# EAGLE board OpenBook_PCB (EAGLE 9.7.0)
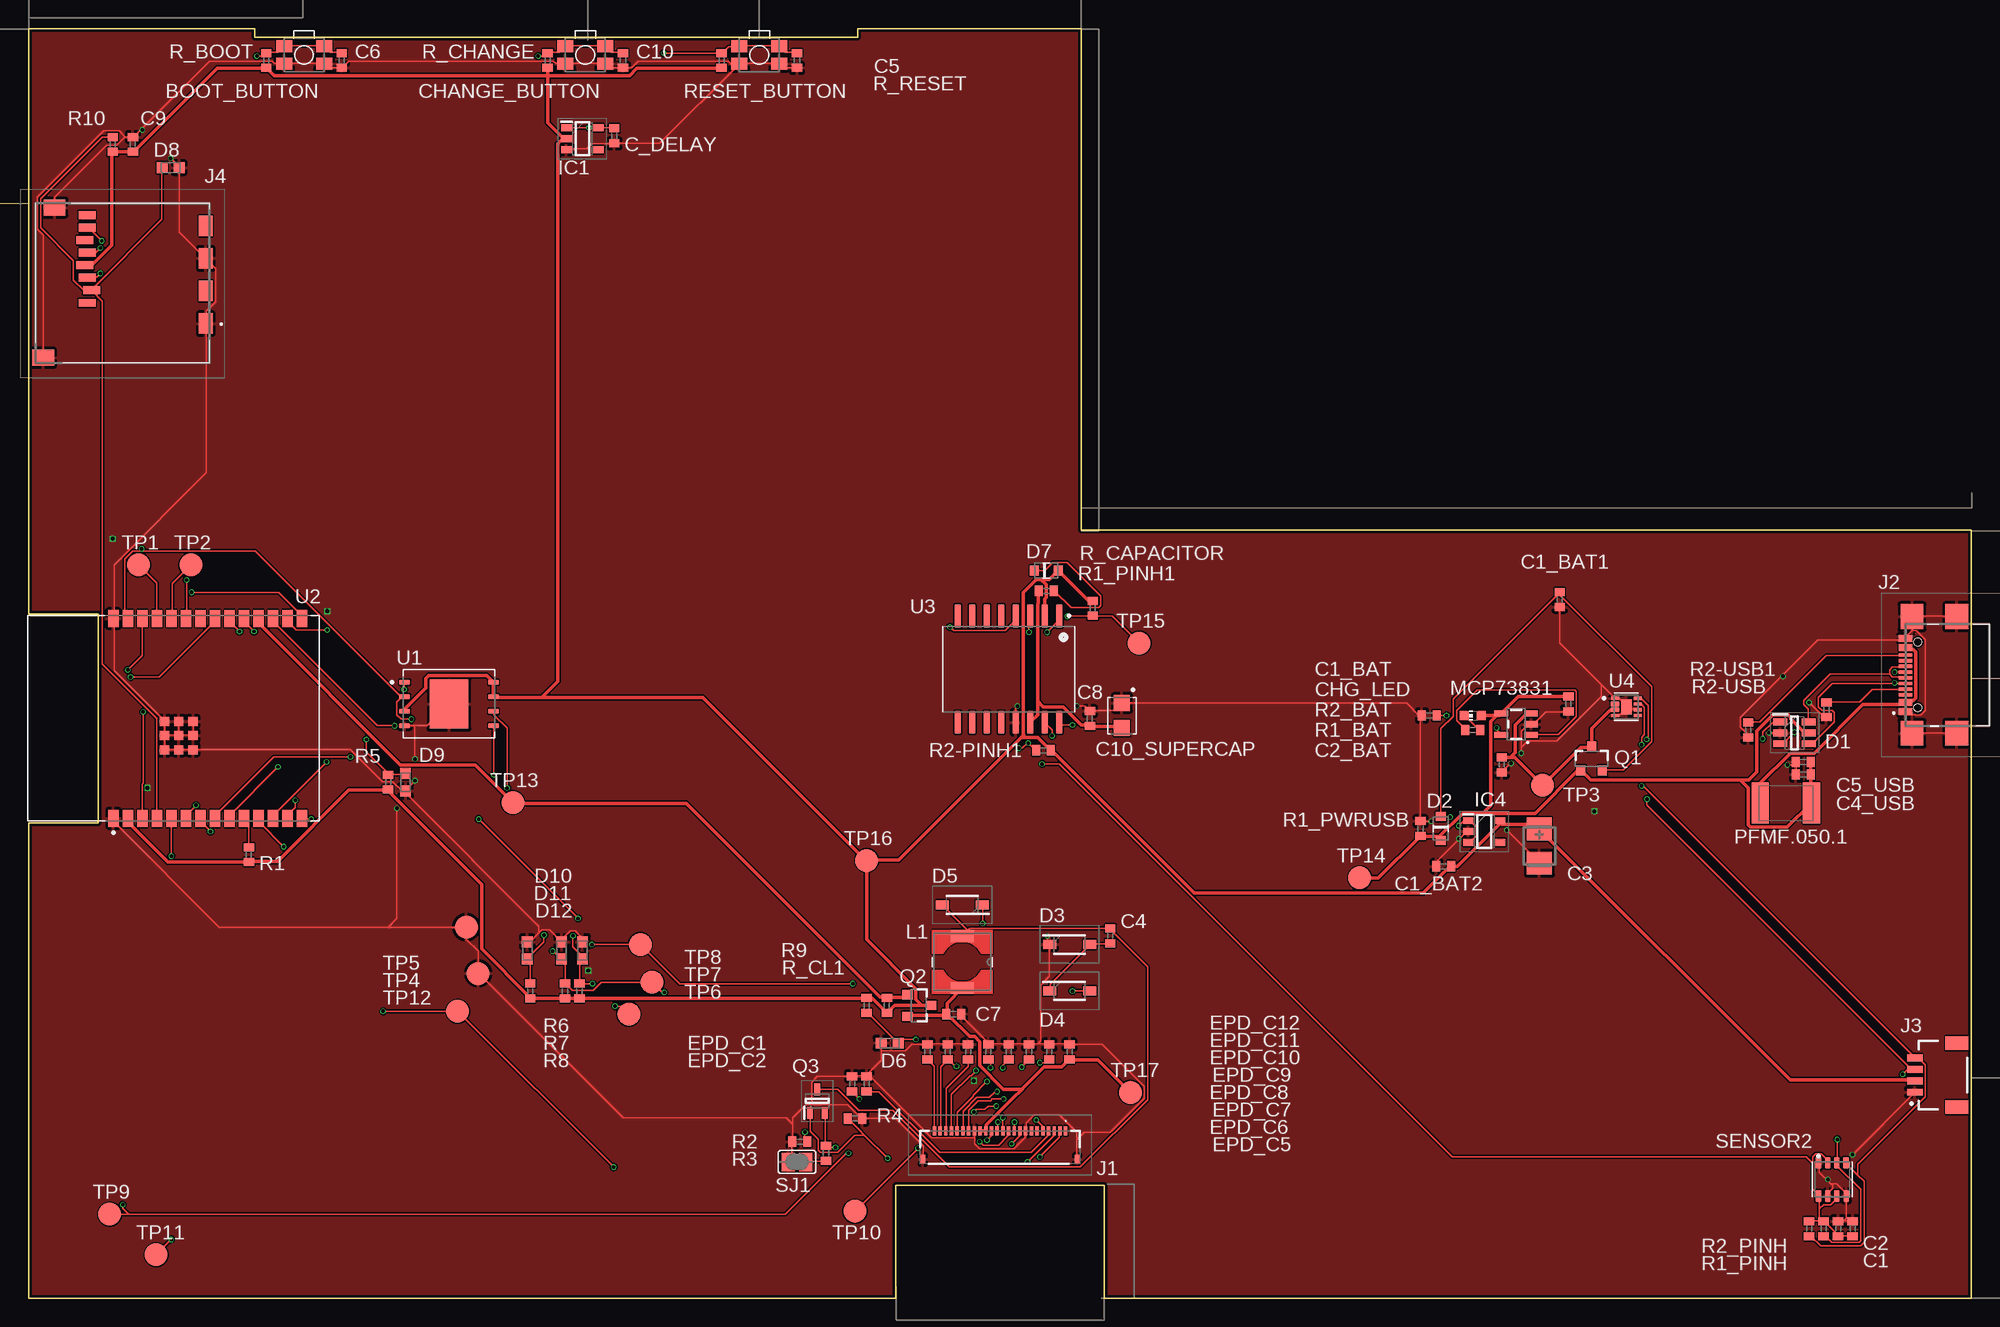
[diagram p0: board, top side]
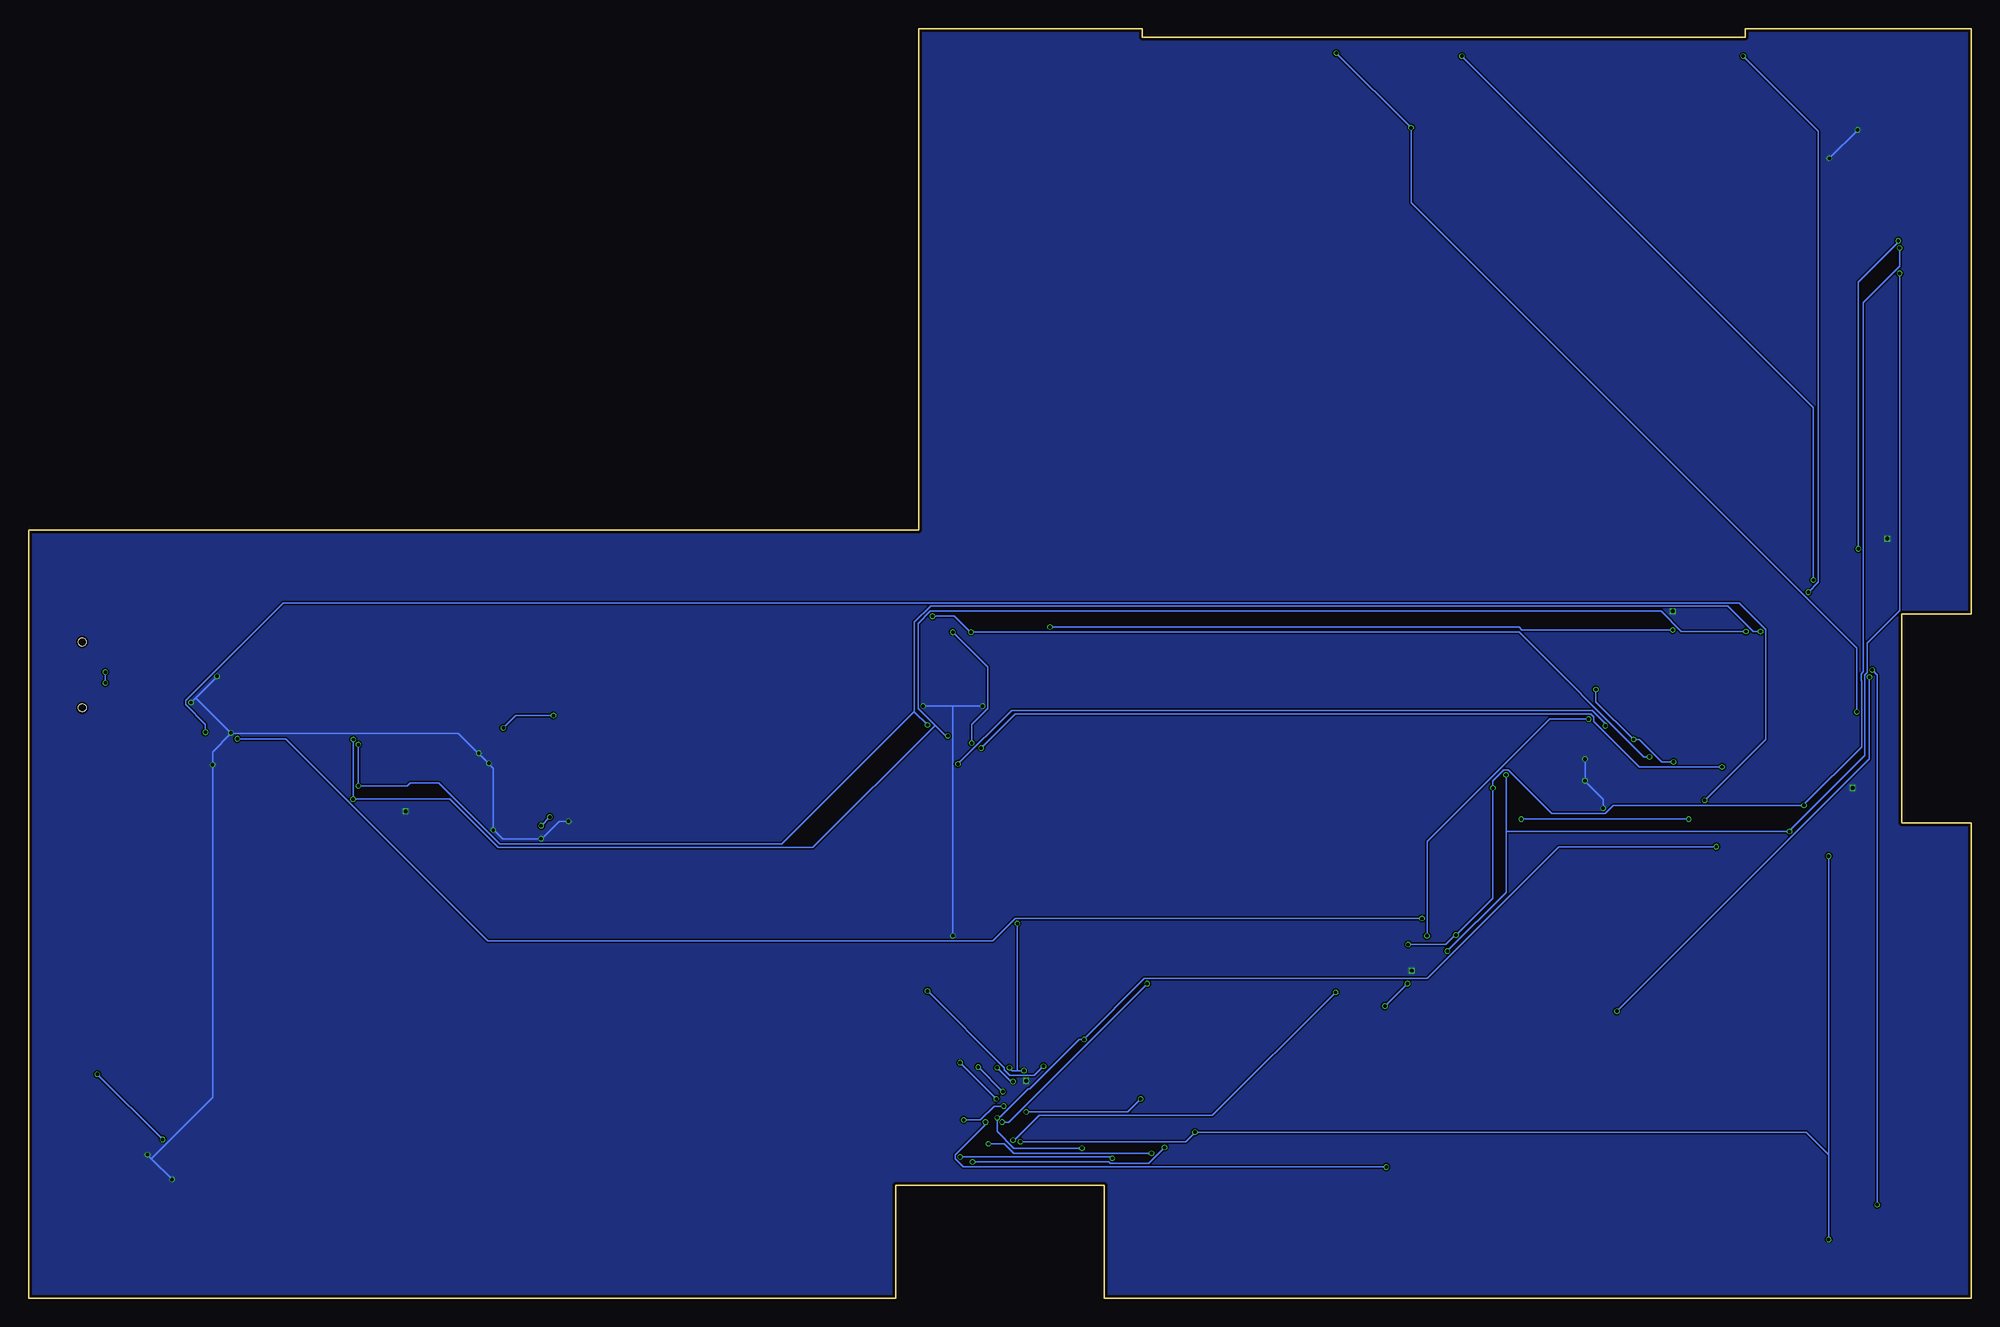
[diagram p1: board, bottom side, seen from below]

Size 170.18 x 111.25 mm. Coordinates in mm from the lower left corner, seen from the top.
Outline: 0,111.25 19.81,111.25 19.81,110.49 72.64,110.49 72.64,111.25 92.2,111.25 92.2,67.31 170.18,67.31 170.18,0 94.23,0 94.23,9.91 75.95,9.91 75.95,0 0,0 0,41.66 6.1,41.66 6.1,59.94 0,59.94 0,111.25
Copper layers (1*16): Top 0.035mm / dielectric 1.6mm / Bottom 0.035mm
Design rules "jlcpcb-2layers.dru *": minimum track width 5mil, minimum drill 0.3mm, track to track 5mil, track to pad 5mil, pad to pad 5mil, via to via 5mil, smd to smd 5mil, copper to edge 0.2mm, drill to drill 6mil, minimum pad ring 10mil, minimum via ring 3mil, stop-mask expansion 4mil, vias tented up to drill 0mil, thermal gap 10mil
Net classes: 1 POWER: width 0.3 mm; 2 NORMAL: width 0.15 mm

## Footprints (pad centres in the part's own frame; a part is rotated, then mirrored left to right if it is on the bottom)
MYBUTTON = smd 1.4 x 1.05: 1 1.75,0.75; 2 -1.75,0.75; 3 -1.75,-0.75; 4 1.75,-0.75
EAGLE-LTSPICE_C0402 = smd 0.7 x 0.9: 1 -0.65,0; 2 0.65,0
RCL_CT3528 = smd 2 x 2.2: + -1.5,0; - 1.5,0
CAPCP3225X100N = smd 1.4 x 1.4: 1 -1.1,0; 2 1.1,0
ADAFRUIT_CHIP-LED0603 = smd 0.8 x 0.8: A 0,-0.75; C 0,0.75
SOT95P280X145-6N = smd 1.2 x 0.6: 1 -1.25,0.95; 2 -1.25,0; 3 -1.25,-0.95; 4 1.25,-0.95; 5 1.25,0; 6 1.25,0.95
ESP32_WROVER_AVX---SD0805S020S1R0_AVX_SD0805S020S1R0_0 = smd 0.8 x 0.9: 1 -1.05,0; 2 1.05,0
SOD3716X135N = smd 1.15 x 0.8: 1 -1.75,0; 2 1.75,0
DIOC1608X36N = smd 0.97 x 0.94: 1 -0.75,0; 2 0.75,0
SOT95P280X125-5N = smd 0.9 x 0.6: 1 -1.4,0.95; 2 -1.4,0; 3 -1.4,-0.95; 4 1.4,-0.95; 5 1.4,0.95
SOT95P280X120-5N = smd 0.9 x 0.6: 1 -1.4,0.95; 2 -1.4,0; 3 -1.4,-0.95; 4 1.4,-0.95; 5 1.4,0.95
FH34SRJ24S05SH99 = smd 0.3 x 0.8: 1 5.75,1.45; 2 5.25,1.45; 3 4.75,1.45; 4 4.25,1.45; 5 3.75,1.45; 6 3.25,1.45; 7 2.75,1.45; 8 2.25,1.45; 9 1.75,1.45; 10 1.25,1.45; 11 0.75,1.45; 12 0.25,1.45; 13 -0.25,1.45; 14 -0.75,1.45; 15 -1.25,1.45; 16 -1.75,1.45; 17 -2.25,1.45; 18 -2.75,1.45; 19 -3.25,1.45; 20 -3.75,1.45; 21 -4.25,1.45; 22 -4.75,1.45; 23 -5.25,1.45; 24 -5.75,1.45 | smd 0.4 x 0.8: MP1 6.75,-1.05; MP2 -6.75,-1.05
SAMACSYS_PARTS_USB4110GFA = smd 0.3 x 1.15: A1 -3.35,3.678; A4 -2.55,3.678; A5 -1.25,3.678; A6 -0.25,3.678; A7 0.25,3.678; A8 1.25,3.678; A9 2.55,3.678; A12 3.35,3.678; B1 3.05,3.678; B4 2.25,3.678; B5 1.75,3.678; B6 0.75,3.678; B7 -0.75,3.678; B8 -1.75,3.678; B9 -2.25,3.678; B12 -3.05,3.678 | smd 2.18 x 2: MP1 -5.11,-0.827; MP2 5.11,-0.827; MP3 -5.11,3.103; MP4 5.11,3.103 | hole 0.65: -2.89,2.603; 2.89,2.603
JST04_1MM_RA = smd 0.6 x 1.35: 1 -1.5,0; 2 -0.5,0; 3 0.5,0; 4 1.5,0 | smd 1.2 x 2: NC1 2.8,-3.675; NC2 -2.8,-3.675
112ATAARR03ATTEND = smd 1.8 x 1.2: G1 10.6,10.4; G2 4.9,10.4; S1 7.75,10.4; S2 2.05,10.4 | smd 1.4 x 1.9: G3 13.6,-3.85; G4 0.45,-2.85 | smd 0.7 x 1.5: P1 8.8,0; P2 7.7,0.4; P3 6.6,0; P4 5.5,-0.2; P5 4.4,0; P6 3.3,-0.2; P7 2.2,0; P8 1.1,0
IND_4828-WE-TPC_WRE = smd 1.016 x 2.032: 1 -2.286,0; 2 2.286,0
ESP32_WROVER_SPARKFUN-IC-POWER_SOT23-5 = smd 0.55 x 1.2: 1 -0.95,-1.3; 2 0,-1.3; 3 0.95,-1.3; 4 0.95,1.3; 5 -0.95,1.3
ESP32C6_VARISTOR_CT/CN1812 = smd 1.5 x 3.6: 1 -2.25,0; 2 2.25,0
ESP32_WROVER_SPARKFUN-DISCRETESEMI_SOT23-3 = smd 0.8 x 0.9: 1 -0.95,-1; 2 0.95,-1; 3 0,1.1
SOT65P210X110-3N = smd 1.05 x 0.5: 1 -1.05,0.65; 2 -1.05,-0.65; 3 1.05,0
ESP32_WROVER_EAGLE-LTSPICE_R0402 = smd 0.7 x 0.9: 1 -0.65,0; 2 0.65,0
ESP32_WROVER_BME680_PSON80P300X300X100-8N = smd 1.016 x 0.5: 1 1.458,1.2; 2 1.458,0.4; 3 1.458,-0.4; 4 1.458,-1.2; 5 -1.458,-1.22; 6 -1.458,-0.4; 7 -1.458,0.4; 8 -1.458,1.2
SJ = smd 1.168 x 1.6: 1 -0.762,0; 2 0.762,0
TP20R = smd 2 x 2: TP 0,0
SON127P600X800X80-9N = smd 0.94 x 0.44: 1 -3.895,1.905; 2 -3.895,0.635; 3 -3.895,-0.635; 4 -3.895,-1.905; 5 3.895,-1.905; 6 3.895,-0.635; 7 3.895,0.635; 8 3.895,1.905 | smd 3.4 x 4.3: 9 0,0
XCVR_ESP32-C6-WROOM-1-N8 = smd 1.5 x 0.9: 1 -8.75,5.26; 2 -8.75,3.99; 3 -8.75,2.72; 4 -8.75,1.45; 5 -8.75,0.18; 6 -8.75,-1.09; 7 -8.75,-2.36; 8 -8.75,-3.63; 9 -8.75,-4.9; 10 -8.75,-6.17; 11 -8.75,-7.44; 12 -8.75,-8.71; 13 -8.75,-9.98; 14 -8.75,-11.25; 15 8.75,-11.25; 16 8.75,-9.98; 17 8.75,-8.71; 18 8.75,-7.44; 19 8.75,-6.17; 20 8.75,-4.9; 21 8.75,-3.63; 22 8.75,-2.36; 23 8.75,-1.09; 24 8.75,0.18; 25 8.75,1.45; 26 8.75,2.72; 27 8.75,3.99; 28 8.75,5.26 | smd 0.8 x 0.8: 29_1 -2.755,0.79; 29_2 -1.505,0.79; 29_3 -0.255,0.79; 29_4 -2.755,-0.46; 29_5 -1.505,-0.46; 29_6 -0.255,-0.46; 29_7 -2.755,-1.71; 29_8 -1.505,-1.71; 29_9 -0.255,-1.71
SOIC127P1032X265-16N = smd 2.05 x 0.59: 1 -4.655,4.445; 2 -4.655,3.175; 3 -4.655,1.905; 4 -4.655,0.635; 5 -4.655,-0.635; 6 -4.655,-1.905; 7 -4.655,-3.175; 8 -4.655,-4.445; 9 4.655,-4.445; 10 4.655,-3.175; 11 4.655,-1.905; 12 4.655,-0.635; 13 4.655,0.635; 14 4.655,1.905; 15 4.655,3.175; 16 4.655,4.445
SON50P200X200X80-9N = smd 0.76 x 0.27: 1 -0.985,0.75; 4 -0.985,-0.75; 5 0.985,-0.75; 6 0.985,-0.25; 7 0.985,0.25; 8 0.985,0.75 | smd 0.762 x 0.457: 2 -0.985,0.25; 3 -0.985,-0.25 | smd 0.9 x 1.3: 9 0,0

## Placement (x,y rotation side)
BOOT_BUTTON  BUTTON_CUSYOMV1  [MYBUTTON]  24.13,108.94 180 top
C1  100nF  [EAGLE-LTSPICE_C0402]  159.77,6.1 90 top
C1_BAT  4.7uF  [EAGLE-LTSPICE_C0402]  134.87,52.07 270 top
C1_BAT1  4.7uF  [EAGLE-LTSPICE_C0402]  134.11,61.21 270 top
C1_BAT2  4.7uF  [EAGLE-LTSPICE_C0402]  123.95,37.85 180 top
C2  100nF  [EAGLE-LTSPICE_C0402]  158.5,6.1 90 top
C2_BAT  4.7uF  [EAGLE-LTSPICE_C0402]  129.03,46.74 270 top
C3  100uF TANT  [RCL_CT3528]  132.33,39.62 270 top
C4  4.7uF/25V  [EAGLE-LTSPICE_C0402]  94.74,31.75 90 top
C4_USB  100nF  [EAGLE-LTSPICE_C0402]  155.45,45.9 180 top
C5  1uF  [EAGLE-LTSPICE_C0402]  67.31,108.46 270 top
C5_USB  4.7uF  [EAGLE-LTSPICE_C0402]  155.45,46.99 180 top
C6  100nF  [EAGLE-LTSPICE_C0402]  27.43,108.46 270 top
C7  10uF  [EAGLE-LTSPICE_C0402]  81.03,24.89 0 top
C8  100nF  [EAGLE-LTSPICE_C0402]  92.96,50.8 90 top
C9  100nF  [EAGLE-LTSPICE_C0402]  9.14,101.09 90 top
C10  100nF  [EAGLE-LTSPICE_C0402]  52.07,108.46 270 top
C10_SUPERCAP  CPH3225A  [CAPCP3225X100N]  95.76,51.05 270 top
C_DELAY  100nF  [EAGLE-LTSPICE_C0402]  51.31,101.85 270 top
CHANGE_BUTTON  BUTTON_CUSYOMV1  [MYBUTTON]  48.77,108.94 180 top
CHG_LED  LED  [ADAFRUIT_CHIP-LED0603]  126.49,51.05 90 top
D1  USBLC6-2SC6Y  [SOT95P280X145-6N]  154.69,49.53 0 top
D2  ESP32_WROVER_AVX---SD0805S020S1R0_AVX_SD0805S020S1R0_0_0AVX_SD0805S020S1R0_0_0  [ESP32_WROVER_AVX---SD0805S020S1R0_AVX_SD0805S020S1R0_0]  123.7,41.15 270 top
D3  MBR0530  [SOD3716X135N]  91.19,30.99 0 top
D4  MBR0530  [SOD3716X135N]  91.19,26.92 0 top
D5  MBR0530  [SOD3716X135N]  81.79,34.45 180 top
D6  PGB1010603MR  [DIOC1608X36N]  75.44,22.35 180 top
D7  ESP32_WROVER_AVX---SD0805S020S1R0_AVX_SD0805S020S1R0_0_0AVX_SD0805S020S1R0_0_0  [ESP32_WROVER_AVX---SD0805S020S1R0_AVX_SD0805S020S1R0_0]  89.15,63.75 0 top
D8  PGB1010603MR  [DIOC1608X36N]  12.45,99.06 0 top
D9  PGB1010603MR  [DIOC1608X36N]  33.02,45.21 270 top
D10  PGB1010603MR  [DIOC1608X36N]  43.69,30.48 90 top
D11  PGB1010603MR  [DIOC1608X36N]  46.68,30.48 90 top
D12  PGB1010603MR  [DIOC1608X36N]  48.51,30.48 270 top
EPD_C1  1uF/50V  [EAGLE-LTSPICE_C0402]  73.41,18.8 90 top
EPD_C2  1uF/50V  [EAGLE-LTSPICE_C0402]  72.14,18.8 90 top
EPD_C5  0.1uF/50V  [EAGLE-LTSPICE_C0402]  91.19,21.59 90 top
EPD_C6  1uF/50V  [EAGLE-LTSPICE_C0402]  89.41,21.59 90 top
EPD_C7  1uF/50V  [EAGLE-LTSPICE_C0402]  87.63,21.59 90 top
EPD_C8  1uF/50V  [EAGLE-LTSPICE_C0402]  85.85,21.59 90 top
EPD_C9  1uF/50V  [EAGLE-LTSPICE_C0402]  84.07,21.59 90 top
EPD_C10  1uF/50V  [EAGLE-LTSPICE_C0402]  82.3,21.59 90 top
EPD_C11  1uF/50V  [EAGLE-LTSPICE_C0402]  80.52,21.59 90 top
EPD_C12  1uF/50V  [EAGLE-LTSPICE_C0402]  78.74,21.59 90 top
IC1  BD5229G-TR  [SOT95P280X125-5N]  48.51,101.6 0 top
IC4  XC6220A331MR-G  [SOT95P280X120-5N]  127.51,40.89 0 top
J1  FH34SRJ-24S-0.5SH_99_  [FH34SRJ24S05SH99]  85.09,13.21 0 top
J2  SAMACSYS_PARTS_USB4110-GF-A  [SAMACSYS_PARTS_USB4110GFA]  168.08,54.61 90 top
J3  QWIIC_RIGHT_ANGLE  [JST04_1MM_RA]  165.23,19.56 90 top
J4  112A-TAAR-R03_ATTEND  [112ATAARR03ATTEND]  5.13,96.01 270 top
L1  68uH  [IND_4828-WE-TPC_WRE]  81.79,29.46 270 top
MCP73831  ESP32_WROVER_SPARKFUN-IC-POWER_MCP73831  [ESP32_WROVER_SPARKFUN-IC-POWER_SOT23-5]  130.3,50.29 90 top
PFMF.050.1  ESP32C6_VARISTORCN1812  [ESP32C6_VARISTOR_CT/CN1812]  153.92,43.39 0 top
Q1  20V/4.2A/52mΩ/1.4W  [ESP32_WROVER_SPARKFUN-DISCRETESEMI_SOT23-3]  136.91,47.24 0 top
Q2  20V/4.2A/52mΩ/1.4W  [ESP32_WROVER_SPARKFUN-DISCRETESEMI_SOT23-3]  77.98,25.65 270 top
Q3  SI1308EDL-T1-GE3  [SOT65P210X110-3N]  69.09,17.27 90 top
R1  10K  [ESP32_WROVER_EAGLE-LTSPICE_R0402]  19.3,38.86 90 top
R1_BAT  200  [ESP32_WROVER_EAGLE-LTSPICE_R0402]  126.49,49.78 0 top
R1_PINH  10K  [ESP32_WROVER_EAGLE-LTSPICE_R0402]  157.23,6.1 90 top
R1_PINH1  10K  [ESP32_WROVER_EAGLE-LTSPICE_R0402]  93.22,60.45 90 top
R1_PWRUSB  100K  [ESP32_WROVER_EAGLE-LTSPICE_R0402]  121.92,41.15 270 top
R2  2.2  [ESP32_WROVER_EAGLE-LTSPICE_R0402]  67.56,13.72 0 top
R2-PINH1  10K  [ESP32_WROVER_EAGLE-LTSPICE_R0402]  88.9,48.01 0 top
R2-USB  5k1  [ESP32_WROVER_EAGLE-LTSPICE_R0402]  150.62,49.78 270 top
R2-USB1  5k1  [ESP32_WROVER_EAGLE-LTSPICE_R0402]  157.48,51.56 90 top
R2_BAT  2K  [ESP32_WROVER_EAGLE-LTSPICE_R0402]  122.68,51.05 0 top
R2_PINH  10K  [ESP32_WROVER_EAGLE-LTSPICE_R0402]  155.96,6.1 90 top
R3  0.47  [ESP32_WROVER_EAGLE-LTSPICE_R0402]  69.85,12.7 270 top
R4  10K  [ESP32_WROVER_EAGLE-LTSPICE_R0402]  72.39,15.75 0 top
R5  10K  [ESP32_WROVER_EAGLE-LTSPICE_R0402]  31.5,45.21 270 top
R6  10K  [ESP32_WROVER_EAGLE-LTSPICE_R0402]  43.94,26.92 270 top
R7  10K  [ESP32_WROVER_EAGLE-LTSPICE_R0402]  46.99,26.92 270 top
R8  10K  [ESP32_WROVER_EAGLE-LTSPICE_R0402]  48.26,26.92 270 top
R9  10K  [ESP32_WROVER_EAGLE-LTSPICE_R0402]  73.41,25.65 90 top
R10  10K  [ESP32_WROVER_EAGLE-LTSPICE_R0402]  7.37,101.09 270 top
R_BOOT  10K  [ESP32_WROVER_EAGLE-LTSPICE_R0402]  20.83,108.46 90 top
R_CAPACITOR  15  [ESP32_WROVER_EAGLE-LTSPICE_R0402]  89.15,61.98 0 top
R_CHANGE  10K  [ESP32_WROVER_EAGLE-LTSPICE_R0402]  45.47,108.46 90 top
R_CL1  10K  [ESP32_WROVER_EAGLE-LTSPICE_R0402]  75.18,25.65 90 top
R_RESET  10K  [ESP32_WROVER_EAGLE-LTSPICE_R0402]  60.71,108.46 90 top
RESET_BUTTON  RESET_BUTTON  [MYBUTTON]  64.01,108.94 180 top
SENSOR2  BME688  [ESP32_WROVER_BME680_PSON80P300X300X100-8N]  157.99,10.41 90 top
SJ1  SW  [SJ]  67.31,11.94 0 top
TP1  TPTP20R  [TP20R]  9.65,64.26 0 top
TP2  TPTP20R  [TP20R]  14.22,64.26 0 top
TP3  TPTP20R  [TP20R]  132.59,44.96 0 top
TP4  TPTP20R  [TP20R]  39.37,28.45 0 top
TP5  TPTP20R  [TP20R]  38.35,32.51 0 top
TP6  TPTP20R  [TP20R]  52.58,24.89 0 top
TP7  TPTP20R  [TP20R]  54.61,27.69 0 top
TP8  TPTP20R  [TP20R]  53.59,30.99 0 top
TP9  TPTP20R  [TP20R]  7.11,7.37 0 top
TP10  TPTP20R  [TP20R]  72.39,7.62 0 top
TP11  TPTP20R  [TP20R]  11.18,3.81 0 top
TP12  TPTP20R  [TP20R]  37.59,25.15 0 top
TP13  TPTP20R  [TP20R]  42.42,43.43 0 top
TP14  TPTP20R  [TP20R]  116.59,36.83 0 top
TP15  TPTP20R  [TP20R]  97.28,57.4 0 top
TP16  TPTP20R  [TP20R]  73.41,38.35 0 top
TP17  TPTP20R  [TP20R]  96.52,18.03 0 top
U1  W25Q512JVEIQ  [SON127P600X800X80-9N]  36.83,52.07 0 top
U2  ESP32-C6-WROOM-1-N8  [XCVR_ESP32-C6-WROOM-1-N8]  12.7,50.8 90 top
U3  DS3231SN#  [SOIC127P1032X265-16N]  85.85,55.12 270 top
U4  MAX17048G+T10  [SON50P200X200X80-9N]  139.95,51.82 0 top

## Library data of the parts
BOOT_BUTTON CHANGE_BUTTON CHG_LED PFMF.050.1 RESET_BUTTON SJ1 TP1-TP17 = DeskAssistant v19 v1
C1 C1_BAT C1_BAT1 C1_BAT2 C2 C2_BAT C4 C4_USB C5 C5_USB C6-C10 C_DELAY EPD_C1 EPD_C2 EPD_C5-EPD_C12 = DeskAssistant v19 v1; SPICEMODEL: NONE; SPICEPREFIX: C
C3 = DeskAssistant v19 v1; SPICEPREFIX: C
C10_SUPERCAP = DeskAssistant v19 v1; AVAILABILITY: Not in stock; CHECK_PRICES: https://www.snapeda.com/parts/CPH3225A/Seiko+Instruments/view-part/?ref=eda; DESCRIPTION: 11 mF (EDLC) Supercapacitor 3.3 V 1210 (3225 Metric) - -; MF: Seiko Instruments; MP: CPH3225A; PACKAGE: 1210 Seiko; PRICE: None; PURCHASE-URL: https://www.snapeda.com/api/url_track_click_mouser/?unipart_id=562593&manufacturer=Seiko Instruments&part_name=CPH3225A&search_term=None; SNAPEDA_LINK: https://www.snapeda.com/parts/CPH3225A/Seiko+Instruments/view-part/?ref=snap
D1 = DeskAssistant v19 v1; AVAILABILITY: In Stock; CHECK_PRICES: https://www.snapeda.com/parts/USBLC6-2SC6Y/STMicroelectronics/view-part/?ref=eda; DESCRIPTION: 17V Clamp 5A (8/20µs) Ipp Tvs Diode Surface Mount SOT-23-6; MF: STMicroelectronics; MP: USBLC6-2SC6Y; PACKAGE: SOT-23-6 STMicroelectronics; PRICE: None; SNAPEDA_LINK: https://www.snapeda.com/parts/USBLC6-2SC6Y/STMicroelectronics/view-part/?ref=snap
D2 D7 = DeskAssistant v19 v1; CENTROID_NOT_SPECIFIED: No; DATASHEET: http://datasheets.avx.com/schottky.pdf; DIGIKEY_DESCRIPTION: DIODE SCHOTTKY 20V 1A 0805; DIGIKEY_PART_NUMBER: 478-7800-1-ND; LEAD_FREE: yes; MF: AVX; MOUSER_PART_NUMBER: 581-SD0805S020S1R0; PACKAGE: 0805 (2012 metric); PREFIX: D; ROHS: yes; TEMPERATURE_RANGE_HIGH: +125°C; TEMPERATURE_RANGE_LOW: -55°C
D3-D5 = DeskAssistant v19 v1; AVAILABILITY: In Stock; CHECK_PRICES: https://www.snapeda.com/parts/MBR0530/Onsemi/view-part/?ref=eda; DESCRIPTION: Diode Schottky 30 V 500mA Surface Mount SOD-123; MF: ON Semiconductor; MP: MBR0530; PACKAGE: SOD-123-2 ON Semiconductor; PRICE: None; PURCHASE-URL: https://www.snapeda.com/api/url_track_click_mouser/?unipart_id=179458&manufacturer=ON Semiconductor&part_name=MBR0530&search_term=None; SNAPEDA_LINK: https://www.snapeda.com/parts/MBR0530/Onsemi/view-part/?ref=snap
D6 D8-D12 = DeskAssistant v19 v1; AVAILABILITY: In Stock; CHECK_PRICES: https://www.snapeda.com/parts/PGB1010603MR/Littelfuse/view-part/?ref=eda; DESCRIPTION: 150V (Typ) Clamp - Ipp Tvs Diode Surface Mount 0603 (1608 Metric); MF: Littelfuse Inc.; MP: PGB1010603MR; PACKAGE: 0603 Littelfuse Inc.; PRICE: None; PURCHASE-URL: https://www.snapeda.com/api/url_track_click_mouser/?unipart_id=5659453&manufacturer=Littelfuse Inc.&part_name=PGB1010603MR&search_term=None; SNAPEDA_LINK: https://www.snapeda.com/parts/PGB1010603MR/Littelfuse/view-part/?ref=snap
IC1 = DeskAssistant v19 v1; DESCRIPTION: Voltage Detector with Adjustable Delay Time: CMOS processes are utilized to develop high precision, low current consumption CMOS reset ICs that allow arbitrary setting of the delay time. The extensive lineup includes both Nch Open Drain and CMOS output types in a wide range of detection voltages (from 2.3V to 6.0V, in 0.1V steps), enabling selection of the ideal solution based on customer requirements. In addition, the entire series is of course both lead-free and RoHS-compliant.; HEIGHT: 1.25mm; MANUFACTURER_NAME: ROHM Semiconductor; MANUFACTURER_PART_NUMBER: BD5229G-TR; MOUSER_PART_NUMBER: 755-BD5229G-TR; MOUSER_PRICE-STOCK: https://www.mouser.co.uk/ProductDetail/ROHM-Semiconductor/BD5229G-TR?qs=4kLU8WoGk0vvnhrrYwdszw%3D%3D
IC4 = DeskAssistant v19 v1; DESCRIPTION: LDO Voltage Regulators; HEIGHT: 1.2mm; MANUFACTURER_NAME: Torex; MANUFACTURER_PART_NUMBER: XC6220A331MR-G; MOUSER_PART_NUMBER: 865-XC6220A331MR-G; MOUSER_PRICE-STOCK: https://www.mouser.co.uk/ProductDetail/Torex-Semiconductor/XC6220A331MR-G?qs=AsjdqWjXhJ8ZSWznL1J0gg%3D%3D
J1 = DeskAssistant v19 v1; DESCRIPTION: 24 Position FFC, FPC Connector Contacts, Top and Bottom 0.020" (0.50mm) Surface Mount, Right Angle; HEIGHT: 1.1mm; MANUFACTURER_NAME: Hirose; MANUFACTURER_PART_NUMBER: FH34SRJ-24S-0.5SH(99); MOUSER_PART_NUMBER: 798-FH34SRJ24S05SH99; MOUSER_PRICE-STOCK: https://www.mouser.co.uk/ProductDetail/Hirose-Connector/FH34SRJ-24S-0.5SH99?qs=vcbW%252B4%252BSTIpKBl5ap9J8Fw%3D%3D
J2 = DeskAssistant v19 v1; DESCRIPTION: CONN USB 2.0 TYPE-C R/A SMT; HEIGHT: 3.26mm; MANUFACTURER_NAME: GCT (GLOBAL CONNECTOR TECHNOLOGY); MANUFACTURER_PART_NUMBER: USB4110-GF-A; MOUSER_PART_NUMBER: 640-USB4110-GF-A; MOUSER_PRICE-STOCK: https://www.mouser.co.uk/ProductDetail/GCT/USB4110-GF-A?qs=KUoIvG%2F9IlYiZvIXQjyJeA%3D%3D
J3 = DeskAssistant v19 v1; PROD_ID: CONN-13694
J4 = DeskAssistant v19 v1; DESCRIPTION: Micro SD Card Socket, Push-Push Type, Top Mount, SMT, H=1.83mm, 10u; HEIGHT: 1.9mm; MANUFACTURER_NAME: ATTEND; MANUFACTURER_PART_NUMBER: 112A-TAAR-R03 ATTEND
L1 = DeskAssistant v19 v1; COPYRIGHT: Copyright (C) 2024 Ultra Librarian. All rights reserved.; MANUFACTURER_PART_NUMBER: 744043680; MFR_NAME: Wurth Electronics
MCP73831 = DeskAssistant v19 v1; PROD_ID: IC-09995
Q1 Q2 = DeskAssistant v19 v1; PROD_ID: TRAN-14388
Q3 = DeskAssistant v19 v1; AVAILABILITY: In Stock; CHECK_PRICES: https://www.snapeda.com/parts/SI1308EDL-T1-GE3/Vishay+Siliconix/view-part/?ref=eda; DESCRIPTION: Si1308EDL-T1-GE3 N-channel MOSFET Transistor, 1.5 A, 30 V, 3-Pin SC-70 | Siliconix / Vishay SI1308EDL-T1-GE3; MF: Vishay Siliconix; MP: SI1308EDL-T1-GE3; PACKAGE: SOT-323 Vishay Semiconductor; PRICE: None; PURCHASE-URL: https://www.snapeda.com/api/url_track_click_mouser/?unipart_id=274603&manufacturer=Vishay Siliconix&part_name=SI1308EDL-T1-GE3&search_term=None; SNAPEDA_LINK: https://www.snapeda.com/parts/SI1308EDL-T1-GE3/Vishay+Siliconix/view-part/?ref=snap
R1 R1_BAT R1_PINH R1_PINH1 R1_PWRUSB R2 R2-PINH1 R2-USB R2-USB1 R2_BAT R2_PINH R3-R10 R_BOOT R_CAPACITOR R_CHANGE R_CL1 R_RESET = DeskAssistant v19 v1; SPICEMODEL: NONE; SPICEPREFIX: R
SENSOR2 = DeskAssistant v19 v1; AVAILABILITY: Unavailable; DESCRIPTION: Integrated Environmental Unit; MF: Bosch Sensortec; MP: BME680; PACKAGE: LGA-8 Bosch Tools; PRICE: None
U1 = DeskAssistant v19 v1; AVAILABILITY: In Stock; CHECK_PRICES: https://www.snapeda.com/parts/W25Q512JVEIQ/Winbond+Electronics/view-part/?ref=eda; DESCRIPTION: FLASH - NOR Memory IC 512Mb (64M x 8) SPI - Quad I/O 133 MHz 8-WSON (8x6); MF: Winbond Electronics; MP: W25Q512JVEIQ; PACKAGE: Package; PRICE: None; SNAPEDA_LINK: https://www.snapeda.com/parts/W25Q512JVEIQ/Winbond+Electronics/view-part/?ref=snap
U2 = DeskAssistant v19 v1; AVAILABILITY: In Stock; CHECK_PRICES: https://www.snapeda.com/parts/ESP32-C6-WROOM-1-N8/Espressif+Systems/view-part/?ref=eda; DESCRIPTION: Multiprotocol Modules ESP32-C6 module, Wi-Fi 6 in 2.4 GHz band, Bluetooth 5, Zigbee 3.0 and Thread. ESP34-WROOM Compatible - ENGINEERING SAMPLE; MF: Espressif Systems; MP: ESP32-C6-WROOM-1-N8; PACKAGE: None; PRICE: None; SNAPEDA_LINK: https://www.snapeda.com/parts/ESP32-C6-WROOM-1-N8/Espressif+Systems/view-part/?ref=snap
U3 = DeskAssistant v19 v1; AVAILABILITY: In Stock; CHECK_PRICES: https://www.snapeda.com/parts/DS3231SN%23/Analog+Devices/view-part/?ref=eda; DESCRIPTION: Extremely Accurate I²C-Integrated RTC/TCXO/Crystal; MF: Analog Devices; MP: DS3231SN#; PACKAGE: SOIC-16 Maxim; PRICE: None; PURCHASE-URL: https://www.snapeda.com/api/url_track_click_mouser/?unipart_id=99048&manufacturer=Analog Devices&part_name=DS3231SN#&search_term=None; SNAPEDA_LINK: https://www.snapeda.com/parts/DS3231SN%23/Analog+Devices/view-part/?ref=snap
U4 = DeskAssistant v19 v1; AVAILABILITY: In Stock; CHECK_PRICES: https://www.snapeda.com/parts/MAX17048G+T10/Analog+Devices/view-part/?ref=eda; DESCRIPTION: 3µA 1-Cell/2-Cell Fuel Gauge with ModelGauge; MF: Analog Devices; MP: MAX17048G+T10; PACKAGE: TDFN-8 Maxim; PRICE: None; PURCHASE-URL: https://www.snapeda.com/api/url_track_click_mouser/?unipart_id=329239&manufacturer=Analog Devices&part_name=MAX17048G+T10&search_term=None; SNAPEDA_LINK: https://www.snapeda.com/parts/MAX17048G+T10/Analog+Devices/view-part/?ref=snap

## Nets
3V3 [POWER]: C1_BAT2.1 C3.+ C9.1 D7.2 IC1.2 IC4.5 J3.2 J4.P4 Q2.3 R1.1 R1_PINH1.2 R2-PINH1.2 R5.2 R6.2 R7.2 R8.2 R9.2 R10.2 R_BOOT.1 R_CHANGE.1 R_CL1.1 R_RESET.1 TP16.TP U1.3 U1.7 U1.8 U2.2 U3.2
32KHZ [NORMAL]: R2-PINH1.1 U2.9 U3.1
DN [NORMAL]: D1.4 J2.A7 J2.B7
DP [NORMAL]: D1.6 J2.A6 J2.B6
EPD_3V3 [POWER]: C7.1 EPD_C5.1 J1.15 J1.16 L1.2 Q2.2 TP17.TP
EPD_3V3_C [POWER]: Q2.1 R_CL1.2 TP13.TP U2.18
EPD_BUSY [NORMAL]: J1.9 TP9.TP U2.26
EPD_CS [NORMAL]: D6.1 J1.12 R9.1 TP10.TP U2.11
EPD_DC [NORMAL]: J1.11 R2.2 TP11.TP U2.5
EPD_RST [NORMAL]: J1.10 TP12.TP U2.21
FLASH_CS [NORMAL]: D9.1 R5.1 U1.1 U2.12
GDR [NORMAL]: J1.2 Q3.1 R4.1
GND [NORMAL]: BOOT_BUTTON.1 BOOT_BUTTON.2 C1.2 C1_BAT1.2 C1_BAT2.2 C1_BAT.2 C2.2 C2_BAT.2 C3.- C4_USB.2 C5.2 C5_USB.2 C6.2 C7.2 C8.2 C9.2 C10.2 C10_SUPERCAP.1 C_DELAY.2 CHANGE_BUTTON.1 CHANGE_BUTTON.2 D1.2 D3.1 D6.2 D8.2 D9.2 D10.2 D11.2 D12.1 EPD_C1.2 EPD_C2.2 EPD_C5.2 EPD_C6.2 EPD_C7.2 EPD_C8.2 EPD_C9.2 EPD_C10.2 EPD_C11.2 EPD_C12.2 IC1.3 IC4.2 J1.8 J1.17 J1.MP1 J1.MP2 J2.A1 J2.A12 J2.B1 J2.B12 J2.MP1 J2.MP2 J2.MP3 J2.MP4 J3.1 J4.G1 J4.G2 J4.G3 J4.G4 MCP73831.2 R1_PWRUSB.1 R2-USB1.1 R2-USB.2 R2.1 R2_BAT.1 R4.2 RESET_BUTTON.1 RESET_BUTTON.2 SENSOR2.1 SENSOR2.5 SENSOR2.7 SJ1.1 TP4.TP TP5.TP U1.4 U1.9 U2.1 U2.28 U2.29_1 U2.29_2 U2.29_3 U2.29_4 U2.29_5 U2.29_6 U2.29_7 U2.29_8 U2.29_9 U3.13 U4.1 U4.4 U4.6 U4.9
GPIO8 [NORMAL]: R1.2 U2.10
I2C_PW [NORMAL]: C1.1 C2.1 R1_PINH.2 R2_PINH.2 SENSOR2.2 SENSOR2.6 SENSOR2.8 U2.17
INT_RTC [NORMAL]: R1_PINH1.1 TP15.TP U2.8 U3.3
IO/BOOT [NORMAL]: BOOT_BUTTON.3 BOOT_BUTTON.4 C6.1 R_BOOT.2 U2.15
IO/CHANGE [NORMAL]: C10.1 CHANGE_BUTTON.3 CHANGE_BUTTON.4 R_CHANGE.2 U2.23
MISO [NORMAL]: D12.2 J4.P7 R8.1 TP6.TP U1.2 U2.27
MOSI [NORMAL]: D11.1 J1.14 J4.P3 R7.1 TP7.TP U1.5 U2.7
N$1 [NORMAL]: J2.B5 R2-USB.1
N$2 [NORMAL]: J2.A5 R2-USB1.2
N$3 [NORMAL]: C1_BAT1.1 D2.1 IC4.1 IC4.3 Q1.2
N$4 [NORMAL]: C4.1 D3.2 D4.1
N$5 [NORMAL]: MCP73831.1 R1_BAT.1
N$6 [NORMAL]: CHG_LED.C R1_BAT.2
N$7 [NORMAL]: MCP73831.5 R2_BAT.2
N$8 [NORMAL]: EPD_C2.1 J1.5
N$9 [NORMAL]: EPD_C1.1 J1.4
N$10 [NORMAL]: EPD_C6.1 J1.18
N$11 [NORMAL]: EPD_C7.1 J1.19
N$12 [NORMAL]: EPD_C8.1 J1.20
N$13 [NORMAL]: C_DELAY.1 IC1.5
N$14 [NORMAL]: EPD_C10.1 J1.22
N$16 [NORMAL]: EPD_C12.1 J1.24
N$17 [NORMAL]: D7.1 R_CAPACITOR.2
PREVGH [NORMAL]: D5.1 EPD_C9.1 J1.21
PREVGL [NORMAL]: D4.2 EPD_C11.1 J1.23
RESE [NORMAL]: J1.3 Q3.2 R3.1
RESE' [NORMAL]: R3.2 SJ1.2
RESET [NORMAL]: C5.1 IC1.1 R_RESET.2 RESET_BUTTON.3 RESET_BUTTON.4 U2.3
RTC_RST [NORMAL]: U2.16 U3.4
RX [NORMAL]: TP2.TP U2.24
SCK [NORMAL]: D10.1 J1.13 J4.P5 R6.1 TP8.TP U1.6 U2.6
SCL [NORMAL]: J3.4 R2_PINH.1 SENSOR2.4 U2.20 U3.16 U4.7
SDA [NORMAL]: J3.3 R1_PINH.1 SENSOR2.3 U2.19 U3.15 U4.8
SRC [NORMAL]: C4.2 D5.2 L1.1 Q3.3
SS_SD [NORMAL]: D8.1 J4.P2 R10.1 U2.4
TX [NORMAL]: TP1.TP U2.25
USB_D+ [NORMAL]: D1.1 U2.14
USB_D- [NORMAL]: D1.3 U2.13
VBAT [POWER]: C2_BAT.1 MCP73831.3 Q1.3 TP3.TP U4.2 U4.3
VBUS [POWER]: C1_BAT.1 C4_USB.1 C5_USB.1 CHG_LED.A D1.5 D2.2 MCP73831.4 PFMF.050.1.2 Q1.1 R1_PWRUSB.2 TP14.TP
VRTC [POWER]: C8.1 C10_SUPERCAP.2 R_CAPACITOR.1 U3.14
VUSB [POWER]: J2.A4 J2.A9 J2.B4 J2.B9 PFMF.050.1.1

## Tracks (layer width: path | path; a pad name or v marks a point on that pad's centre or on a via)
3V3
  Top 0.3: 45.47,107.12 45.47,103 46.86,101.6 IC1.2 46.74,101.54 46.35,101.16 46.35,54.04 44.96,52.64 | 45.47,107.12 R_CHANGE.1 | 45.47,107.12 52.64,107.12 53.28,107.76 60.71,107.76 R_RESET.1 | J4.P4 4.95,90.55 5.59,90.55 7.3,92.27 7.3,100.33 R10.2 7.37,100.46 9.14,100.46 C9.1 9.27,100.52 16.51,107.76 20.83,107.76 R_BOOT.1 20.95,107.7 21.53,107.12 45.47,107.12 | 128.91,41.59 125.16,37.85 C1_BAT2.1 124.46,37.78 122.17,35.5 102.11,35.5 89.66,47.94 R2-PINH1.2 89.53,48.01 88.39,49.15 86.93,49.15 | 128.91,41.59 128.91,41.78 IC4.5 | J3.2 165.23,19.11 154.31,19.11 132.33,41.08 C3.+ 132.21,41.15 131.83,41.53 129.03,41.53 128.91,41.59 | U2.2 8.76,42.04 8.76,41.66 12.19,38.23 19.3,38.23 R1.1 19.43,38.29 21.84,38.29 28.07,44.51 31.5,44.51 R5.2 31.56,44.39 39.69,36.26 39.69,30.61 43.88,26.42 R6.2 43.94,26.29 46.99,26.29 R7.2 47.12,26.29 48.26,26.29 R8.2 48.39,26.29 73.28,26.29 R9.2 73.91,26.29 75.18,25.02 R_CL1.1 75.31,25.08 75.88,25.65 78.23,25.65 | 88.68,62.99 89.15,62.99 89.41,62.99 90.17,63.75 D7.2 90.3,63.69 92.84,61.15 93.22,61.15 R1_PINH1.2 | U3.2 89.03,61.28 89.15,61.4 89.15,62.48 89.13,62.51 89.13,62.54 88.68,62.99 | U1.3 32.96,51.44 32.96,51.63 34.8,53.47 34.8,54.29 35.05,54.55 40.13,54.55 40.7,53.98 U1.8 40.7,53.85 40.7,52.7 U1.7 40.83,52.64 44.96,52.64 | 78.23,25.65 Q2.3 | TP16.TP 73.41,31.43 77.72,27.11 77.72,26.16 78.23,25.65 | 44.96,52.64 59.05,52.64 73.28,38.42 TP16.TP | 86.93,49.15 76.2,38.42 73.53,38.42 TP16.TP | 86.93,49.15 87.15,49.37 87.12,49.4 87.12,61.85 88.27,62.99 88.39,62.99 88.68,62.99
32KHZ  (via drill 0.3)
  Top 0.15: v89.22,58.36 90.3,59.44 U3.1 | R2-PINH1.1 88.2,48.01 v87.57,48.64 87.5,48.64 87.06,48.2 v86.74,48.2 | v21.84,46.55 17.65,42.35 17.65,42.1 U2.9
  Bottom 0.15: v87.57,48.64 87.57,50.29 86.17,51.69 86.17,55.31 v89.22,58.36 | v21.84,46.55 29.08,46.55 33.08,50.55 33.08,50.93 33.34,51.18 83.76,51.18 v86.74,48.2
DN  (via drill 0.3)
  Top 0.15: 163.45,53.85 157.99,53.85 156.78,52.64 156.78,51.82 157.1,51.5 157.99,51.5 158.18,51.31 158.18,50.48 156.34,48.64 155.96,48.64 D1.4 | 163.45,53.85 164.34,53.85 J2.B7 | v163.45,54.86 164.34,54.86 J2.A7 | v163.45,53.91 163.45,53.85
  Bottom 0.15: v163.45,53.91 v163.45,54.86
DP
  Top 0.15: 163,54.67 163.26,54.42 164.34,54.42 J2.A6 | 163,54.67 163,55.05 163.26,55.31 164.34,55.31 J2.B6 | 163,54.67 157.8,54.67 155.51,52.39 155.51,52.01 155.89,51.63 155.89,50.48 D1.6
EPD_3V3
  Top 0.3: Q2.2 77.03,24.77 80.2,24.77 80.33,24.89 C7.1 | L1.2 80.45,25.84 80.45,25.02 C7.1 | J1.16 83.38,14.67 83.82,14.67 J1.15 83.88,14.8 83.88,15.18 86.2,17.49 87.03,18.32 | TP17.TP 93.66,20.89 91.19,20.89 EPD_C5.1 91.06,20.83 90.49,20.26 88.96,20.26 87.06,18.35 87.03,18.32 | C7.1 80.52,24.83 82.42,22.92 82.87,22.92 83.31,22.48 83.31,20.38 85.38,18.32 87.03,18.32
EPD_3V3_C
  Top 0.3: Q2.1 76.96,26.54 76.77,26.35 75.18,26.35 R_CL1.2 75.06,26.42 74.55,26.42 57.59,43.37 42.55,43.37 TP13.TP 39.12,46.74 32.58,46.74 20.19,59.12 20.19,59.5 U2.18
EPD_BUSY  (via drill 0.3)
  Top 0.15: v86.11,13.53 86.81,14.22 86.81,14.61 J1.9 | v71.82,12.7 71.63,12.7 66.29,7.37 8.89,7.37 8.76,7.37 | TP9.TP 8.26,7.37 8.76,7.37 | v8.7,55.05 9.97,56.33 9.97,59.5 U2.26 | v8.26,8.19 8.26,7.87 8.76,7.37
  Bottom 0.15: v86.11,13.53 84.71,13.53 83.88,12.7 v71.82,12.7 | v8.7,55.05 8.26,54.61 v8.26,8.19
EPD_CS  (via drill 0.3)
  Top 0.15: v85.34,15.81 J1.12 | v77.72,22.67 76.52,22.67 D6.1 76.14,22.35 73.53,24.96 73.41,24.96 R9.1 | v22.35,39.56 20.19,41.72 20.19,42.04 U2.11 | v77.92,13.14 TP10.TP
  Bottom 0.15: v22.35,39.56 36.13,39.56 47.69,28 72.45,28 77.72,22.73 v77.72,22.67 78.14,22.67 82.47,18.34 82.62,18.34 85.15,15.81 v85.34,15.81 85.34,14.61 83.88,13.14 v77.92,13.14
EPD_DC  (via drill 0.3)
  Top 0.15: v83.31,13.72 83.63,13.4 84.96,13.4 85.79,14.22 85.79,14.61 J1.11 | v68.01,14.54 68.01,13.91 68.2,13.72 R2.2 | v12.51,38.73 12.51,42.04 U2.5 | TP11.TP v12.51,5.14
  Bottom 0.15: v83.31,13.72 68.83,13.72 v68.01,14.54 14.48,14.54 12.51,12.57 | v12.51,5.14 12.51,12.45 12.51,12.57 | 12.51,12.57 12.51,14.54 v12.51,38.73
EPD_RST  (via drill 0.3)
  Top 0.15: v86.36,15.43 86.36,14.67 J1.10 | v51.24,11.49 TP12.TP v31.05,25.15 | U2.21 16.32,59.5 16.32,59.31 11.43,54.42 v8.94,54.42
  Bottom 0.15: v86.36,15.43 86.36,15.24 89.03,12.57 89.03,12.19 88.33,11.49 v51.24,11.49 | v31.05,25.15 8.94,47.26 v8.94,54.42
FLASH_CS  (via drill 0.3)
  Top 0.15: D9.1 33.02,45.91 31.5,45.91 R5.1 31.5,45.97 29.59,47.88 v29.59,48.96 | v32.89,53.34 32.89,53.98 U1.1 | v26.1,46.99 21.46,42.35 21.46,42.1 U2.12
  Bottom 0.15: v32.89,53.34 32.89,52.26 v29.59,48.96 29.08,48.96 27.11,46.99 v26.1,46.99
GDR  (via drill 0.3)
  Top 0.15: v88.58,12.38 90.3,14.1 90.3,14.61 J1.2 | 73.22,14.29 72.8,14.7 71.75,15.75 R4.1 | 73.22,14.29 v75.25,12.26 | Q3.1 68.45,16.19 68.45,14.61 69.15,13.91 69.15,12.95 69.34,12.76 70.87,12.76 72.36,14.26 72.39,14.29 73.22,14.29
  Bottom 0.15: v88.58,12.38 75.37,12.38 v75.25,12.26
GND  (via drill 0.3, 0.35)
  Top 0.15: 159,6.79 159.77,6.79 C1.2 | 159,6.79 158.5,6.79 C2.2 | SENSOR2.7 157.61,9.02 157.61,9.21 158.02,9.62 158.02,9.87 157.86,10.03 | 157.51,10.38 157.86,10.03 | 157.51,10.38 156.84,11.05 156.84,11.81 SENSOR2.1 | v159.77,12.57 165.23,18.03 J3.1 | v157.61,10.41 157.54,10.41 157.51,10.38 | J2.A1 164.4,51.31 164.4,51.5 J2.B12 | J2.A1 164.47,51.24 164.47,50.04 164.97,49.53 J2.MP3 165.04,49.53 168.85,49.53 J2.MP1 | C4_USB.2 154.81,45.91 154.81,46.99 C5_USB.2 154.75,46.74 v154.05,46.74 | R2-USB.2 150.62,49.34 149.92,50.04 149.92,50.86 153.57,54.52 | 153.57,54.52 156.72,57.66 164.34,57.66 J2.B1 164.4,57.72 164.4,57.91 J2.A12 164.47,57.98 164.97,58.48 | v155.96,52.2 157.23,50.93 157.48,50.93 R2-USB1.1 | v153.67,54.48 153.61,54.48 153.57,54.52 | v152.46,49.53 D1.2 | 164.97,58.48 164.97,59.69 J2.MP4 165.04,59.75 168.85,59.75 J2.MP2 | 164.97,58.48 165.35,58.48 166.12,57.72 166.12,51.5 165.74,51.12 164.53,51.12 J2.A1 | U4.9 139.95,51.69 139.38,51.12 139,51.12 U4.4 | U4.9 139.95,51.94 139.38,52.51 139,52.51 U4.1 138.94,52.58 137.79,53.72 | U4.6 140.91,51.63 139.95,51.63 U4.9 | C1_BAT1.2 134.11,57.4 137.79,53.72 | U3.13 86.49,51.75 v86.61,51.88 | v91.82,51.88 92.52,51.88 92.9,51.5 C8.2 92.96,51.5 95.12,51.5 95.76,52.13 C10_SUPERCAP.1 95.82,52.13 120.71,52.13 121.86,50.99 R2_BAT.1 121.98,51.05 121.92,50.99 R1_PWRUSB.1 121.98,41.78 v122.87,41.78 | 125.32,40.23 125.98,40.89 IC4.2 | 125.32,40.23 123.32,38.23 123.32,37.85 C1_BAT2.2 | v129.86,46.86 129.79,46.86 C2_BAT.2 | 130.75,48.26 130.75,49.66 131.38,50.29 MCP73831.2 131.64,50.35 131.89,50.35 132.91,51.37 134.87,51.37 C1_BAT.2
  Top 0.15: 130.75,48.26 v130.75,47.75 | v129.48,41.02 132.33,38.16 C3.- | v125.28,40.26 125.32,40.23 | IC1.3 47.12,100.71 48.9,100.71 49.34,101.16 51.31,101.16 C_DELAY.2 51.37,101.22 55.31,101.22 62.23,108.14 RESET_BUTTON.1 | C5.2 67.31,107.82 66.1,107.82 65.79,108.14 RESET_BUTTON.2 65.72,108.2 62.29,108.2 RESET_BUTTON.1 | RESET_BUTTON.1 61.85,107.82 61.28,108.39 53.4,108.39 52.83,107.82 52.13,107.82 C10.2 52.07,107.82 50.86,107.82 50.55,108.14 CHANGE_BUTTON.2 50.48,108.2 47.05,108.2 CHANGE_BUTTON.1 46.99,108.2 46.16,108.2 45.97,108.39 28.07,108.39 27.5,107.82 C6.2 27.43,107.82 26.23,107.82 25.91,108.14 BOOT_BUTTON.2 25.84,108.2 22.42,108.2 BOOT_BUTTON.1 22.35,108.2 21.53,108.2 21.34,108.39 15.88,108.39 9.94,102.46 | 8.64,101.73 9.14,101.73 C9.2 9.21,101.73 9.94,102.46 | J4.G4 2.29,96.46 6.86,101.03 7.75,101.03 8.45,101.73 8.45,101.79 7.94,102.3 6.6,102.3 0.76,96.46 0.76,93.66 1.27,93.15 1.27,82.42 J4.G3 | C7.2 81.72,24.89 81.72,24.7 84.07,22.35 EPD_C9.2 84.07,22.29 85.85,22.29 EPD_C8.2 85.92,22.29 87.63,22.29 EPD_C7.2 87.69,22.29 88.39,22.29 | 88.39,22.29 89.41,22.29 EPD_C6.2 89.47,22.29 91.19,22.29 EPD_C5.2 91.25,22.23 94.04,22.23 97.73,18.54 97.73,17.53 94.74,14.54 92.46,14.54 91.89,13.97 91.82,13.97 | SJ1.1 66.86,12.26 66.86,13.72 R2.1 66.93,13.78 66.93,15.24 | J1.MP2 78.36,12.19 78.36,13.34 75.95,15.75 R4.2 73.03,15.68 71.75,16.95 68.9,16.95 | 66.93,15.24 66.93,15.81 68.07,16.95 68.9,16.95 | 82.87,14.03 82.87,13.53 83.31,13.08 86.3,13.08 87.31,14.1 87.31,14.61 J1.8 87.38,14.67 87.38,15.37 88.08,16.07 90.3,16.07 91.82,14.54 91.82,13.97
  Top 0.15: 82.87,14.03 82.87,14.61 J1.17 | 91.82,13.97 91.82,12.19 J1.MP1 | EPD_C10.2 82.3,22.29 80.58,22.29 EPD_C11.2 80.52,22.29 78.74,22.29 EPD_C12.2 78.68,22.23 77.34,22.23 76.77,21.65 74.68,21.65 | EPD_C1.2 73.41,19.49 72.14,19.49 EPD_C2.2 72.07,19.43 69.09,19.43 68.58,18.92 68.58,17.27 68.9,16.95 | 74.68,21.65 74.68,20.83 73.41,19.56 EPD_C1.2 | 74.68,21.65 74.68,22.35 D6.2 | 82.87,14.03 79.12,14.03 73.53,19.62 EPD_C1.2 | 31.5,32.51 TP5.TP 38.35,31.43 39.37,30.42 TP4.TP 39.43,28.45 52.07,15.81 66.36,15.81 66.93,15.24 | 31.5,32.51 16.7,32.51 7.49,41.72 7.49,42.04 U2.1 | 33.85,50.16 34.92,50.16 U1.9 | 33.85,50.16 U1.4 | 44.7,32 44.96,32.26 45.66,32.26 46.67,31.24 D11.2 46.61,31.37 47.43,32.19 47.88,32.19 48.51,31.56 D12.1 | 44.7,32 43.94,31.24 43.69,31.24 D10.2 | D9.2 33.02,44.26 44.7,32.58 44.7,32 | v33.85,47.24 33.85,50.16 | v33.85,45.34 33.02,44.51 D9.2 | U2.29_9 14.41,50.48 14.41,49.34 U2.29_8 14.35,49.34 13.21,49.34 U2.29_5 | U2.29_2 11.94,49.28 11.94,48.07 U2.29_1 12,48.07 13.14,48.07 U2.29_4 13.21,48.07 14.35,48.07 U2.29_7 14.48,48.07 28.19,48.07 30.99,45.28 31.88,45.28 32.64,44.51 32.96,44.51 D9.2 | U2.29_2 11.94,49.34 11.94,50.48 U2.29_3 11.87,50.61 7.49,54.99 7.49,59.5 U2.28 7.49,59.56 7.49,64.26 15.56,72.33 15.56,85.34 J4.G1 15.56,85.47 15.56,86.49 16.38,87.31 16.38,90.23 15.56,91.06 J4.G2 15.49,91.12 13.21,93.41 D8.2 13.21,99.12 v12.45,99.89 | U2.29_5 13.14,49.34 12,49.34 U2.29_2 | U2.29_6 13.14,50.48 13.14,49.4 U2.29_5 | v32.26,42.93 32.26,33.27 31.5,32.51 | v9.97,102.36 9.97,102.42 9.94,102.46 | v89.22,31.75 89.22,31.24 89.41,31.05 D3.1 89.41,30.99 89.41,28.19 88.65,27.43 88.65,22.54 88.39,22.29
  Top 0.15: 159,6.79 159.19,6.99 159.19,8.89 SENSOR2.5 159.19,9.02 159.19,9.21 158.37,10.03 157.86,10.03 | 130.75,48.26 131.32,48.83 133.86,48.83 137.76,52.74 137.76,53.69 137.79,53.72
  Top 0.152: 8.45,101.73 8.64,101.73
  Bottom 0.15: v157.61,10.41 159.42,12.22 | 159.42,12.22 v159.77,12.57 | v153.67,54.48 155.54,52.61 | 155.54,52.61 v155.96,52.2 | 155.54,52.61 v152.46,49.53 | v152.46,49.53 152.46,49.47 154.05,47.88 v154.05,46.74 154.05,17.59 159.42,12.22 | v91.82,51.88 89.22,51.88 | 89.22,51.88 v86.61,51.88 | v122.87,41.78 123.7,41.78 125.22,40.26 v125.28,40.26 128.65,40.26 129.41,41.02 v129.48,41.02 129.48,46.42 129.86,46.8 v129.86,46.86 v130.75,47.75 130.81,47.75 132.52,49.47 152.4,49.47 v152.46,49.53 | v33.85,47.24 v33.85,45.34 33.85,45.28 32.26,43.69 v32.26,42.93 | v12.45,99.89 v9.97,102.36 | v89.22,31.75 89.22,51.88
  other vias: 137.16,42.67 7.37,66.55 26.16,60.2 82.8,19.05 49.02,28.7 10.41,44.7
  pour Top: 6.16,41.61 6.14,41.59 6.11,41.58 0.08,41.58 0.08,0.08 75.87,0.08 75.87,9.92 75.88,9.95 75.9,9.97 75.93,9.98 94.25,9.98 94.28,9.97 94.3,9.95 94.31,9.92 94.31,0.08 170.1,0.08 170.1,67.23 92.19,67.23 92.16,67.25 92.14,67.27 92.13,67.29 92.13,111.18 72.72,111.18 72.72,110.47 72.71,110.45 72.69,110.43 72.66,110.41 19.8,110.41 19.77,110.43 19.75,110.45 19.74,110.47 19.74,111.18 0.08,111.18 0.08,60.02 6.11,60.02 6.14,60.01 6.16,59.99 6.17,59.96 6.17,41.64
  pour Bottom: 6.16,41.61 6.14,41.59 6.11,41.58 0.08,41.58 0.08,0.08 75.87,0.08 75.87,9.92 75.88,9.95 75.9,9.97 75.93,9.98 94.25,9.98 94.28,9.97 94.3,9.95 94.31,9.92 94.31,0.08 170.1,0.08 170.1,67.23 92.19,67.23 92.16,67.25 92.14,67.27 92.13,67.29 92.13,111.18 72.72,111.18 72.72,110.47 72.71,110.45 72.69,110.43 72.66,110.41 19.8,110.41 19.77,110.43 19.75,110.45 19.74,110.47 19.74,111.18 0.08,111.18 0.08,60.02 6.11,60.02 6.14,60.01 6.16,59.99 6.17,59.96 6.17,41.64
GPIO8
  Top 0.15: R1.2 19.3,41.66 18.92,42.04 U2.10
I2C_PW  (via drill 0.3)
  Top 0.15: C1.1 159.77,5.46 158.5,5.46 C2.1 158.5,5.52 157.29,6.73 R1_PINH.2 | R2_PINH.2 155.96,6.79 157.23,6.79 R1_PINH.2 | 156.84,7.87 156.84,6.86 R1_PINH.2 | 156.84,7.87 156.84,8.19 156.84,8.95 SENSOR2.8 156.78,9.02 156.27,9.53 156.27,11.81 | SENSOR2.6 158.37,8.95 158.37,8.7 157.86,8.19 157.23,8.19 156.91,7.87 156.84,7.87 | 156.27,11.81 156.27,12.38 156.53,12.64 157.04,12.64 157.54,12.13 157.54,11.87 SENSOR2.2 | v32.07,50.16 30.54,50.16 21.46,59.24 21.46,59.5 U2.17 | v88.77,46.8 90.3,46.8 124.71,12.38 155.7,12.38 156.27,11.81
  Bottom 0.15: v32.07,50.16 32.07,50.35 33.21,51.5 84.07,51.5 v88.77,46.8
INT_RTC  (via drill 0.3)
  Top 0.15: TP15.TP 94.93,59.75 93.22,59.75 R1_PINH1.1 93.15,59.75 v91,59.75 | v28.19,47.43 21.46,47.43 16.38,42.35 16.38,42.1 U2.8 | v87.63,58.36 87.63,59.63 87.76,59.75 U3.3
  Bottom 0.15: v28.19,47.43 28.7,47.43 39.62,58.36 v87.63,58.36 87.69,58.36 89.09,59.75 v91,59.75
IO/BOOT  (via drill 0.3)
  Top 0.15: C6.1 27.43,109.16 26.42,109.16 25.91,109.67 BOOT_BUTTON.3 25.84,109.73 22.42,109.73 BOOT_BUTTON.4 22.35,109.67 21.84,109.16 20.83,109.16 R_BOOT.2 20.77,109.09 20.51,108.84 v20,108.84 | v14.29,61.85 21.91,61.85 23.94,59.82 23.94,59.56 U2.15
  Bottom 0.15: v14.29,61.85 13.4,62.74 13.4,102.23 v20,108.84
IO/CHANGE  (via drill 0.3)
  Top 0.15: C10.1 52.07,109.16 51.05,109.16 50.55,109.67 CHANGE_BUTTON.3 50.48,109.73 47.05,109.73 CHANGE_BUTTON.4 46.99,109.67 46.48,109.16 45.47,109.16 R_CHANGE.2 45.4,109.09 45.15,108.84 v44.64,108.84 | v13.84,62.93 13.84,59.56 U2.23
  Bottom 0.15: v13.84,62.93 13.84,78.04 v44.64,108.84
MISO  (via drill 0.3)
  Top 0.15: v49.4,27.56 48.32,27.56 R8.1 48.26,29.46 48.51,29.72 D12.2 48.51,29.97 47.69,30.8 v47.69,31.75 | v51.37,25.59 51.88,25.59 TP6.TP | 9.91,65.47 9.14,65.47 8.44,64.76 8.44,59.83 8.7,59.56 U2.27 | v6.41,92.65 5.27,93.79 5.14,93.79 J4.P7 | 9.91,65.47 v9.91,65.66 | v33.53,50.74 32.64,50.74 32.26,51.12 32.26,52.26 32.64,52.64 U1.2 32.61,52.7 19.85,65.47 9.91,65.47
  Bottom 0.15: v51.37,25.59 v49.4,27.56 | v6.41,92.65 6.41,92.52 9.91,89.03 v9.91,65.66 | v47.69,31.75 47.69,40.01 36.96,50.74 v33.53,50.74
MOSI  (via drill 0.3)
  Top 0.15: v83.95,13.84 84.33,14.22 84.33,14.61 J1.14 | v55.69,26.8 55.5,26.8 TP7.TP 50.16,27.69 49.47,26.99 47.62,26.99 47.05,27.56 R7.1 46.99,29.46 46.74,29.72 D11.1 46.61,29.72 v45.91,30.42 | v40.77,45.85 40.77,50.16 U1.5 | v15.94,40.89 15.11,41.72 15.11,42.04 U2.7 | v6.29,89.79 5.97,89.47 5.14,89.47 J4.P3
  Bottom 0.15: v83.95,13.84 83.82,13.84 81.66,16 66.48,16 v55.69,26.8 | 40.77,40.89 40.77,35.56 v45.91,30.42 | 40.77,40.89 v40.77,45.85 | 40.77,40.89 v15.94,40.89 15.94,40.96 9.33,47.57 9.33,54.2 9.37,54.24 9.37,54.6 9.14,54.82 9.14,57.4 6.29,60.26 v6.29,89.79
N$1
  Top 0.15: R2-USB.1 150.62,50.48 151.64,50.48 157.48,56.33 164.34,56.33 J2.B5
N$2
  Top 0.15: R2-USB1.2 157.48,52.26 160.4,52.26 161.48,53.34 164.34,53.34 J2.A5
N$3  (via drill 0.3)
  Top 0.15: IC4.3 126.11,40.01 126.3,40.01 126.81,40.51 126.81,41.27 126.3,41.78 126.11,41.78 IC4.1 126.05,41.78 125.67,41.78 v125.28,41.4 | Q1.2 137.86,46.29 139.7,46.29 142.18,48.77 142.18,53.59 134.05,61.72 C1_BAT1.1 134.11,61.85 124.78,52.51 124.78,50.99 123.7,49.91 D2.1 123.76,42.16 v124.52,42.16
  Bottom 0.15: v124.52,42.16 v125.28,41.4
N$4
  Top 0.15: C4.1 94.74,31.05 93.03,31.05 92.96,30.99 D3.2 92.9,30.92 89.47,27.5 89.47,26.92 D4.1
N$5
  Top 0.15: R1_BAT.1 125.79,49.78 125.79,49.91 125.09,50.61 125.09,51.5 126.87,53.28 135.45,53.28 135.57,53.15 135.57,50.99 133.99,49.4 131.64,49.4 MCP73831.1
N$6
  Top 0.15: R1_BAT.2 127.06,49.78 125.79,51.05 CHG_LED.C
N$7  (via drill 0.3)
  Top 0.15: v124.21,51.05 R2_BAT.2 | v128.59,49.97 128.59,49.78 128.97,49.4 MCP73831.5
  Bottom 0.15: v124.21,51.05 127.51,51.05 v128.59,49.97
N$8  (via drill 0.3)
  Top 0.15: v88.27,15.62 88.84,15.05 J1.5 | v72.77,17.46 72.14,18.1 EPD_C2.1 | v82.8,16.32 83.03,16.54 83.76,16.54 84.05,16.83 v84.77,16.83
  Bottom 0.15: v88.27,15.62 86.81,15.62 85.6,16.83 v84.77,16.83 | v82.8,16.32 73.91,16.32 v72.77,17.46
N$9
  Top 0.15: J1.4 89.28,14.61 89.28,14.22 87.82,12.76 79.82,12.76 74.49,18.1 73.41,18.1 EPD_C1.1
N$10  (via drill 0.3)
  Top 0.15: v88.58,20.64 89.15,20.64 89.41,20.89 EPD_C6.1 | J1.18 82.36,14.67 82.36,16.48 83.18,17.3 84.27,17.3 84.43,17.46 v85.41,17.46
  Bottom 0.15: v88.58,20.64 v85.41,17.46
N$11  (via drill 0.3)
  Top 0.15: v87,20.26 87.63,20.89 EPD_C7.1 | J1.19 81.85,14.67 81.85,16.36 83.07,17.58 84.16,17.58 84.67,18.1 v84.84,18.1
  Bottom 0.15: v87,20.26 v84.84,18.1
N$12  (via drill 0.3)
  Top 0.15: v85.34,20.19 85.34,20.38 85.85,20.89 EPD_C8.1 | J1.20 81.34,16.29 82.75,17.7 82.75,17.79 v83.95,18.99
  Bottom 0.15: v83.95,18.99 84.14,18.99 v85.34,20.19
N$13
  Top 0.15: C_DELAY.1 51.31,102.55 49.97,102.55 IC1.5
N$14
  Top 0.15: J1.22 80.39,14.71 80.39,18.39 82.3,20.29 EPD_C10.1
N$16
  Top 0.15: J1.24 79.31,14.67 79.31,20.32 78.74,20.89 EPD_C12.1
N$17
  Top 0.15: D7.1 89.03,63.75 89.72,64.45 91,64.45 93.92,61.53 93.92,60.71 93.73,60.52 91.31,60.52 89.85,61.98 R_CAPACITOR.2
PREVGH  (via drill 0.3)
  Top 0.15: v84.26,20.19 84.26,20.7 84.07,20.89 EPD_C9.1 | v83.57,32.83 83.57,34.42 D5.1 | J1.21 80.84,17.18 80.83,17.19 80.83,17.86 82.47,19.5 82.56,19.5 v83,19.94
  Bottom 0.15: 83.57,19.94 84.01,19.94 v84.26,20.19 | 83.57,19.94 v83,19.94 | 83.57,19.94 v83.57,32.83
PREVGL  (via drill 0.3)
  Top 0.15: J1.23 79.88,14.67 79.88,20.26 80.52,20.89 EPD_C11.1 80.58,20.89 81.15,20.32 v81.28,20.32 | v91.44,26.92 D4.2
  Bottom 0.15: v91.44,26.92 84.71,20.19 84.71,20 84.22,19.51 82.09,19.51 v81.28,20.32
RESE  (via drill 0.3)
  Top 0.15: v87.5,11.94 89.79,14.22 89.79,14.61 J1.3 | v70.67,13.21 69.98,13.21 69.85,13.34 R3.1 69.79,13.34 69.79,16.19 Q3.2
  Bottom 0.15: v87.5,11.94 75.56,11.94 75.44,11.81 72.07,11.81 v70.67,13.21
RESE'
  Top 0.15: SJ1.2 68.14,12 69.85,12 R3.2
RESET  (via drill 0.3)
  Top 0.15: C5.1 67.31,109.16 66.29,109.16 65.79,109.67 RESET_BUTTON.3 65.72,109.73 62.29,109.73 RESET_BUTTON.4 62.23,109.67 61.34,109.67 60.77,109.09 R_RESET.2 60.71,109.09 v55.63,109.09 | v49.09,102.55 IC1.1 | v10.03,51.37 10.03,45.11 9.96,45.04 9.96,44.37 9.98,44.35 U2.3
  Bottom 0.15: v55.63,109.09 v49.09,102.55 49.09,96.01 10.03,56.96 v10.03,51.37
RTC_RST  (via drill 0.3)
  Top 0.15: v26.16,58.55 23.43,58.55 22.73,59.24 22.73,59.5 U2.16 | v80.71,58.8 81.03,58.48 85.53,58.48 86.49,59.44 U3.4
  Bottom 0.15: v26.16,58.55 39.37,58.55 39.62,58.8 v80.71,58.8
RX
  Top 0.15: TP2.TP 12.57,62.61 12.57,59.56 U2.24
SCK  (via drill 0.3)
  Top 0.15: v84.9,15.43 84.9,14.67 J1.13 | v72.2,27.56 57.02,27.56 TP8.TP v49.34,30.99 | R6.1 43.94,29.46 43.69,29.72 D10.1 43.69,29.78 45.15,31.24 v45.15,31.81 | v41.91,44.7 41.91,49.97 40.77,51.12 40.77,51.44 U1.6 | v14.67,43.18 13.84,42.35 13.84,42.1 U2.6 | v6.29,92.01 5.91,91.63 5.14,91.63 J4.P5
  Bottom 0.15: v84.9,15.43 84.33,15.43 v72.2,27.56 | v6.29,92.01 6.29,90.42 9.46,87.25 9.46,54.89 9.64,54.71 9.64,54.13 9.61,54.09 9.61,48.31 14.67,43.24 v14.67,43.18 31.37,43.18 32.07,42.48 36.77,42.48 40.58,46.29 40.96,46.29 41.91,45.34 v41.91,44.7 41.91,35.05 v45.15,31.81 45.21,31.81 46.04,30.99 v49.34,30.99
SCL  (via drill 0.3)
  Top 0.15: 160.18,10.83 159.73,11.27 159.19,11.81 SENSOR2.4 | 160.18,10.83 160.78,10.22 160.78,4.89 160.46,4.57 156.97,4.57 156.15,5.4 155.96,5.4 R2_PINH.1 | v141.29,48.51 141.29,49.15 141.54,49.4 141.54,51.75 141.29,52.01 140.97,52.01 U4.7 | v141.29,44.9 141.41,44.9 165.23,21.08 J3.4 165.29,21.02 165.54,21.02 166.12,20.45 166.12,17.65 160.21,11.75 160.21,10.86 160.18,10.83 | v18.48,58.42 17.65,59.24 17.65,59.5 U2.20 | v91.44,50.23 90.49,50.23 90.3,50.42 U3.16
  Bottom 0.15: v141.29,48.51 v141.29,44.9 137,44.9 136.73,45.16 134.25,45.16 128.91,39.81 104.2,39.81 92.65,51.37 92.58,51.37 | v18.48,58.42 19.11,58.42 21.34,60.65 91.18,60.65 92.58,59.24 92.58,51.37 | v91.44,50.23 92.58,51.37
SDA  (via drill 0.3)
  Top 0.15: R1_PINH.1 157.23,5.4 157.42,5.4 157.92,4.89 160.34,4.89 160.46,5.02 160.46,9.53 158.43,11.56 158.43,11.81 SENSOR2.3 158.43,11.94 v158.43,13.91 | v141.73,48.96 141.86,49.09 141.86,51.94 141.29,52.51 140.97,52.51 U4.8 | v164.15,19.62 164.72,20.19 J3.3 164.91,20.07 141.76,43.22 v141.76,43.73 | v19.75,58.42 18.92,59.24 18.92,59.5 U2.19 | v89.66,49.28 89.66,49.78 89.03,50.42 U3.15
  Bottom 0.15: 141.73,43.75 v141.73,48.96 | v164.15,19.62 v158.43,13.91 | v19.75,58.42 25.4,58.42 27.18,60.2 91.19,60.2 92.27,59.12 92.27,51.69 90.77,50.2 | 90.77,50.2 89.85,49.28 v89.66,49.28 | 90.77,50.2 101.47,39.5 129.03,39.5 133.28,43.74 141.56,43.74 141.57,43.75 141.73,43.75 | 141.73,43.75 v141.76,43.73
SRC
  Top 0.15: L1.1 82.26,32.23 | 82.26,32.23 82.42,32.38 94.74,32.38 C4.2 94.74,32.32 98.04,29.02 98.04,17.4 92.14,11.49 80.64,11.49 75.69,16.45 72.71,16.45 70.87,18.29 69.09,18.29 Q3.3 | 82.26,32.23 80.07,34.42 D5.2
SS_SD
  Top 0.15: R10.1 7.37,101.73 6.48,101.73 1.08,96.33 1.08,93.79 3.94,90.93 3.94,89.22 4.83,88.33 5.52,88.33 J4.P2 | D8.1 11.68,99.06 11.68,94.55 5.52,88.39 J4.P2 | U2.4 11.24,42.1 11.24,50.8 6.48,55.56 6.48,87.38 5.59,88.27 J4.P2
TX
  Top 0.15: TP1.TP 11.24,62.67 11.24,59.56 U2.25
USB_D+  (via drill 0.3)
  Top 0.15: v151.89,49.02 151.89,49.59 152.72,50.42 153.42,50.42 D1.1 | v39.43,41.97 v48.13,33.27 | v24.77,41.97 24.07,41.97 24,42.04 U2.14
  Bottom 0.15: v48.13,33.27 83.76,33.27 85.72,31.3 129.94,31.3 147.66,49.02 v151.89,49.02 | v24.77,41.97 v39.43,41.97
USB_D-  (via drill 0.3)
  Top 0.15: v154.69,49.59 153.73,48.64 153.48,48.64 D1.3 | v23.37,43.62 23.37,42.99 22.73,42.35 22.73,42.1 U2.13
  Bottom 0.15: v154.69,49.59 154.69,50.29 156.4,52.01 156.4,52.39 147.86,60.93 20.35,60.93 18.03,58.61 18.03,48.96 v23.37,43.62
VBAT
  Top 0.3: U4.2 139,52.01 139,51.63 U4.3 138.88,51.5 138.49,51.5 136.91,49.91 Q1.3 136.78,48.26 135.95,48.26 132.72,45.02 TP3.TP 130.18,47.37 129.79,47.37 | 129.79,47.37 129.03,47.37 C2_BAT.1 | MCP73831.3 131.57,51.18 131.19,51.18 130.24,50.23 130.24,48.01 130.24,47.82 129.79,47.37
VBUS
  Top 0.3: C5_USB.1 156.08,46.99 156.08,45.91 C4_USB.1 156.08,45.78 156.08,43.5 PFMF.050.1.2 156.15,43.37 154.05,41.27 150.81,41.27 150.62,41.47 150.62,44.7 149.92,45.4 | D1.5 155.57,49.53 154.37,50.74 154.37,50.86 154.11,51.12 152.78,51.12 151.38,49.72 151.38,46.1 150.69,45.4 149.92,45.4 | 128.59,51.05 CHG_LED.A | C1_BAT.1 134.87,52.7 130.49,52.7 129.09,51.31 MCP73831.4 128.97,51.18 128.84,51.05 128.59,51.05 | 127.38,42.48 125.6,42.48 123.57,40.45 D2.2 123.7,40.13 123.38,40.45 121.92,40.45 R1_PWRUSB.2 121.79,40.39 118.24,36.83 TP14.TP | 127.38,42.48 131.95,42.48 135.7,46.23 135.95,46.23 Q1.1 136.08,46.16 136.84,45.4 149.92,45.4 | 128.59,51.05 128.08,50.55 128.08,43.18 127.38,42.48
VRTC
  Top 0.3: C10_SUPERCAP.2 95.76,49.97 95.63,50.1 92.96,50.1 C8.1 92.84,50.23 92.2,50.23 90.61,51.82 88.9,51.82 88.39,52.32 | 88.39,52.32 88.39,51.82 88.39,51.12 87.76,50.48 U3.14 | 88.39,52.32 88.39,60.83 88.46,60.9 88.46,61.98 R_CAPACITOR.1
VUSB
  Top 0.3: J2.A9 164.4,56.9 J2.B4 164.53,56.83 165.1,56.83 165.29,56.64 165.29,52.58 165.1,52.39 164.53,52.39 J2.B9 164.4,52.32 J2.A4 164.27,52.01 160.66,52.01 156.4,47.75 154.31,47.75 151.7,45.15 151.7,43.43 PFMF.050.1.1